# Altium PCB PCB1.PcbDoc
Units mm, origin at the board's own origin, x right, y up, seen from the top; angles counter-clockwise.
Board outline 60.96 x 24.77 mm, 2 copper layers (Top Layer, Bottom Layer); 8 components, 6 nets, 30 pads, 0 vias.
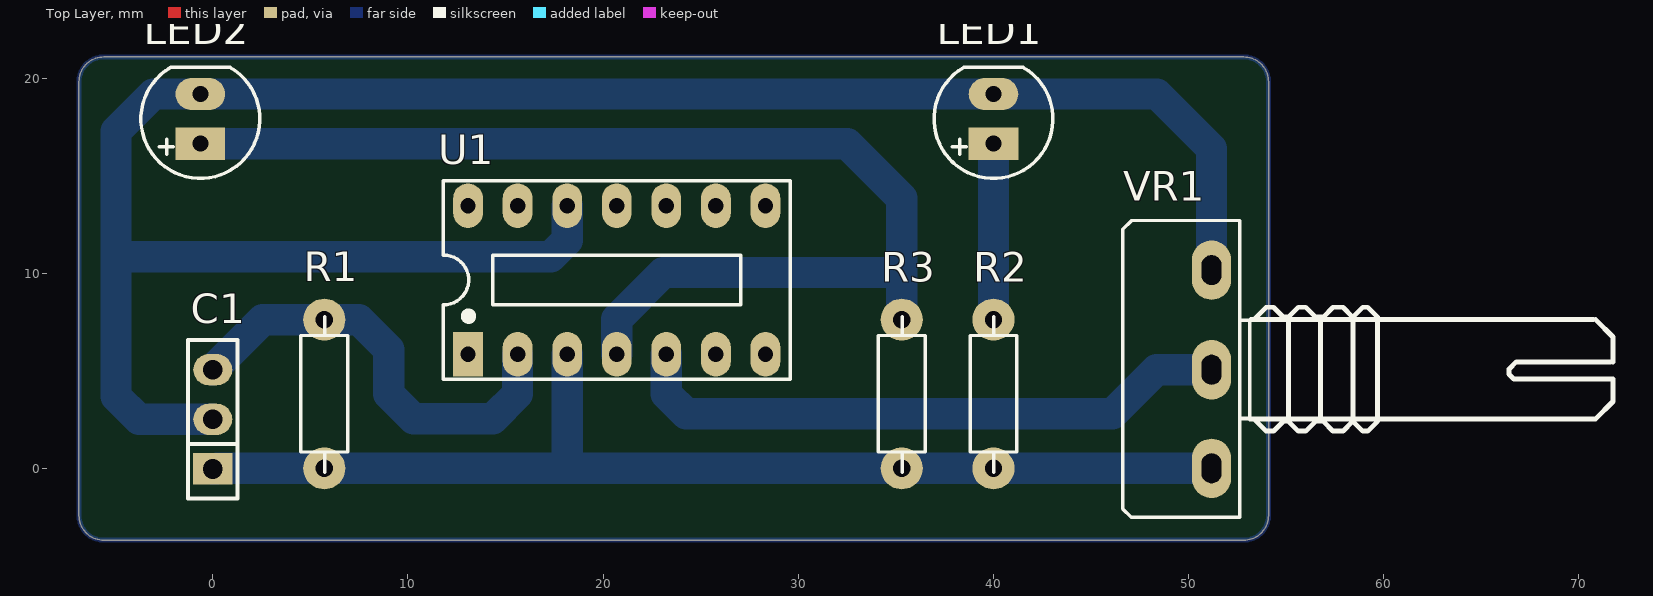
[diagram p0: Top Layer view]
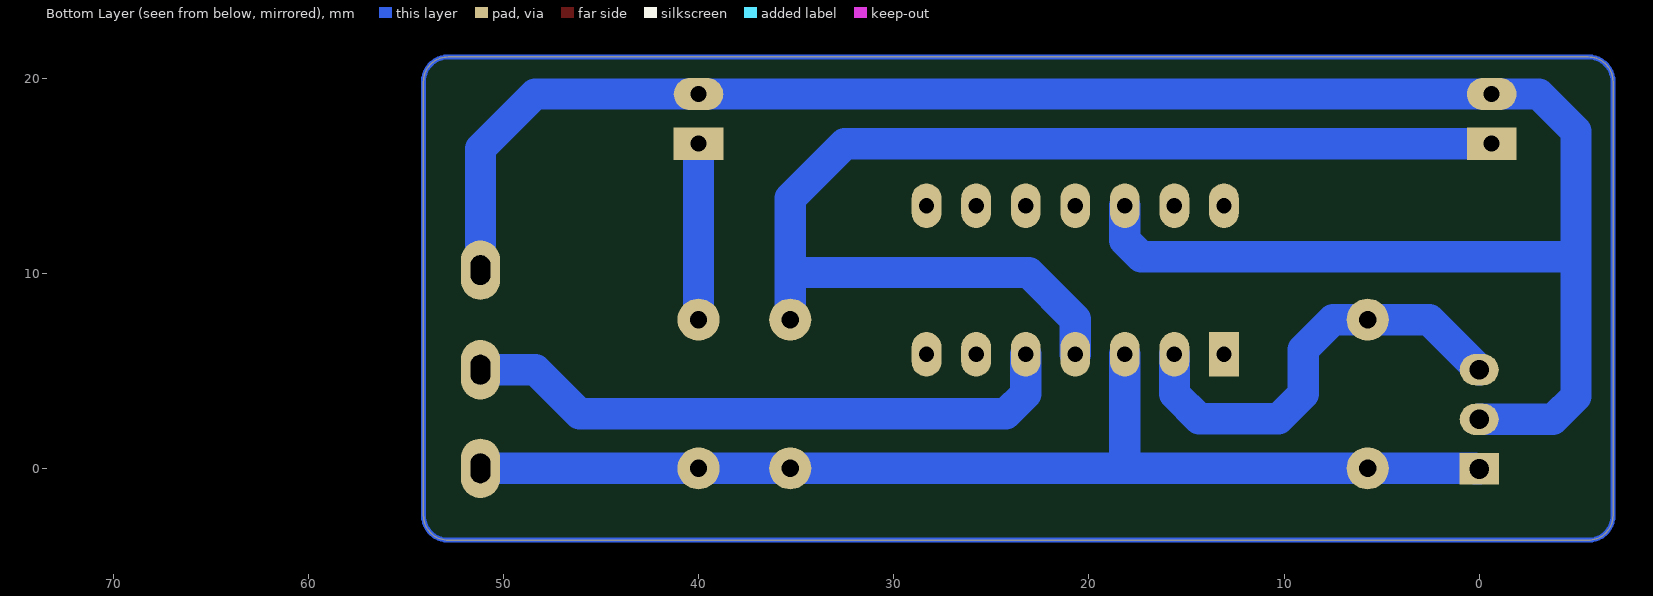
[diagram p1: Bottom Layer view, seen from below]
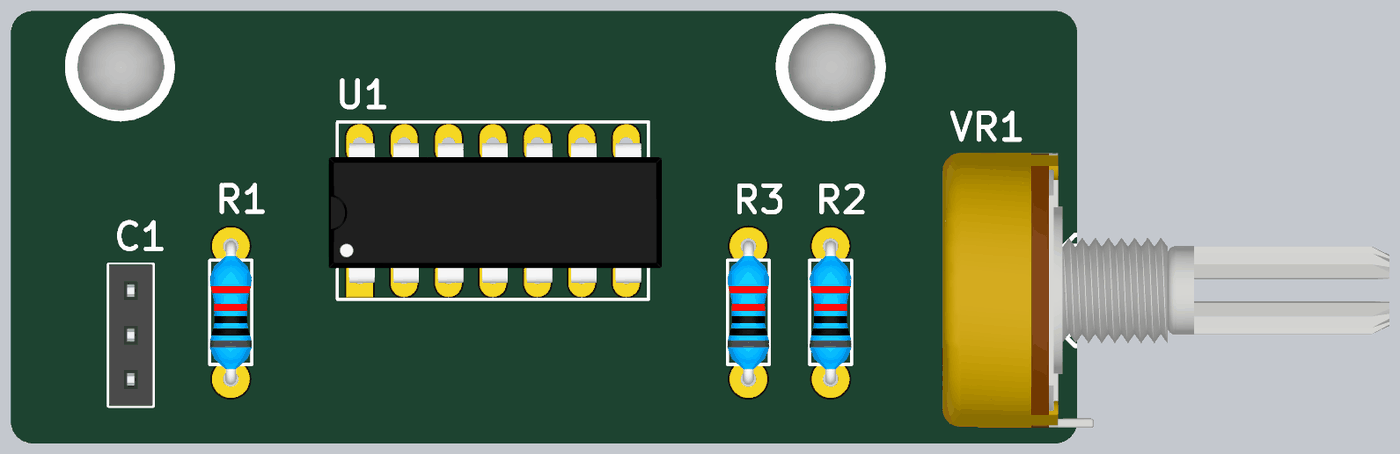
[diagram p2: 3D render of the assembled board from above, using the file's embedded part models]

## Layer stack, top to bottom
Top Solder: solder mask 0.0102, Solder Resist, Dk 3.5
Top Layer: signal copper 0.0356
Dielectric 1: dielectric 0.32, FR-4, Dk 4.8
Bottom Layer: signal copper 0.0356
Bottom Solder: solder mask 0.0102, Solder Resist, Dk 3.5

## Board outline
-6.858,-2.387 -6.858,19.838 cw(c-5.588,19.838) -5.588,21.108 52.832,21.108 cw(c52.832,19.838) 54.102,19.838 54.102,-2.387 cw(c52.832,-2.387) 52.832,-3.657 -5.588,-3.657 cw(c-5.588,-2.387)

## Design rules (kind name [scope] priority, off if disabled: settings)
Clearance [All] p1: gap=0.5 ignorepadtopadclearanceinfootprint=TRUE
PolygonConnect [All] p1: connectstyle=Relief reliefconductorwidth=0.254 reliefentries=4 polygonreliefangle="90 Angle" airgapwidth=0.254
RoomDefinition sch [InComponentClass('sch')] p1: confinementstyle=ConfineIn formatcopy=TRUE lockcomponents=FALSE outline 91.694,-17.627 162.687,-17.627 162.687,10.821 91.694,10.821
RoutingLayers [All] p1: top layer_v5=FALSE bottom layer_v5=TRUE
RoutingVias [All] p1: holewidth=0.711 width=1.27 viastyle="Through Hole" minholewidth=0.711 minwidth=1.27 maxholewidth=0.711 maxwidth=1.27
SolderMaskExpansion [All] p1: expansion=0.102
Width [All] p1: maxlimit=3 minlimit=1.2 preferedwidth=1.6
29 further rules are at their usual default settings.

## Components (designator, comment, footprint, x,y, rotation, side; value= is the part's Value field where it differs from the comment)
C1 "JP3" JP3-C1T 0,0 r90 top
LED1 "LED" LED-5-WHITE 40.005,17.933 r90 top value="LED 3 ly Single Colour"
LED2 "LED" LED-5-WHITE -0.635,17.933 r90 top value="LED 3 ly Single Colour"
R1 "Res" RES-1/4W-SMALL 5.715,3.582 r90 top
R2 "Res" RES-1/4W-SMALL 40.005,3.582 r90 top
R3 "Res" RES-1/4W-SMALL 35.306,3.582 r90 top
U1 "LM339" DIP14 13.081,5.868 r0 top
VR1 "50K" VR-S1 51.181,5.106 r90 top value="Volume 50k"

## Footprints (in the part's own frame and the unit in brackets; to place one, negate y for a bottom-side part, rotate by r counter-clockwise, add the part's x,y. Pads: shape width x height; smd on the part's side, far side on the other; paste and mask are expansions set on the pad)
DIP14 [mil] "DIP, 14-Leads, Row Spacing 7.62mm, Pitch 2.54mm, Body 19.2x6.6mm"
  rect 60x90 hole 31: 1(0,0)
  oval 60x90 hole 31: 2(100,0) 3(200,0) 4(300,0) 5(400,0) 6(500,0) 7(600,0) 8(600,300) 9(500,300) 10(400,300) 11(300,300) 12(200,300) 13(100,300) 14(0,300)
  silkscreen extent -50,-50 650,350, body extent -70,-12 680,302, height 145
JP3-C1T [mm] "3 row, straight, gold plating"
  rect 1.6x2 hole 1.02: 1(0,0)
  oval 1.6x2 hole 1.02: 2(2.54,0) 3(5.08,0)
  silkscreen extent -1.52,-1.27 6.6,1.27, body extent -1.52,-1.25 6.6,1.25, height 8.51
LED-5-WHITE [mil] "LED 2 PIN, 5 ly , Only colour, pin to pin 110mil"
  rect 65x100 hole 32: 1(-50,0)
  oval 65x100 hole 32: 2(50,0)
  silkscreen extent -120,-120 104,120, body extent -124,-125 121,120, height 340
RES-1/4W-SMALL [mil]
  round 85 hole 35: 1(-140,0) 2(160,0)
  silkscreen extent -148,-47 166,47, body extent -152,-47 172,47, height 97
VR-S1 [mil]
  oval 120x78.74 hole 40 slot 60 at 0 deg: 1(-200,0) 2(-1,0) 3(200,0)
  silkscreen extent -299,-810 300,179, body extent -310,-818 310,188, height 839

## Part data
C1: "WR-PHD 2.54 mm Angled Socket Header", Manufacturer="Würth Elektronik eiSos GmbH", partNo=613003143121, ComponentLink1 Description=Manufacturer, ComponentLink1URL=http://www.we-online.com, ComponentLink2 Description=Datasheet, ComponentLink2URL=http://katalog.we-online.de/em/datasheet/6130xx143121.pdf, Created by="Karrer Zheng", Created Date="29 March 2013", NoPins=03
LED1 LED2: "LED Single colour Green and Red"
R1 R2 R3: Manufacturer="Generic Components", Class=Passive, Published=08/06/2000, Publisher="Altium Hobart Technology Centre", SubClass=R
U1: "Low Power Low Offset Voltage Quad Comparators"
VR1: library part VR-S, "Var Resistor"

## Nets (pads, with @x,y where several pads share a name; then routed paths per layer and width w, separated by ;. In a path a pad name is that pad's centre, name@x,y a point inside that pad or via, vN(x,y) a via of type N, cw(c..) or ccw(c..) an arc to the next point about the centre after c; other vN are vias at no path point)
GND: C1.2 LED1.2 LED2.2 U1.12 VR1.3 | length 108.6
  Bottom Layer w1.6: C1.2 -3.784,2.54 -4.953,3.709 -4.953,10.871 ; U1.12 18.161,11.71 17.323,10.871 -4.953,10.871 ; VR1.3 51.181,16.409 48.387,19.203 LED1.2 LED2.2 -3.048,19.203 -4.953,17.298 -4.953,10.871
NetC1_3: C1.3 R1.2 U1.2 | length 22.7
  Bottom Layer w1.6: C1.3 2.566,7.646 R1.2 7.493,7.646 9.017,6.122 9.017,3.836 10.287,2.566 14.351,2.566 15.621,3.836 U1.2
NetLED1_1: LED1.1 R2.2 | length 9
  Bottom Layer w1.6: R2.2 LED1.1
NetLED2_1: LED2.1 R3.2 U1.4 | length 60.7
  Bottom Layer w1.6: LED2.1 32.512,16.663 35.306,13.869 35.306,10.059 ; U1.4 20.701,7.671 23.089,10.059 35.306,10.059 ; R3.2 35.306,10.059
NetU1_5: U1.5 VR1.2 | length 31.3
  Bottom Layer w1.6: U1.5 23.241,3.836 24.257,2.82 46.101,2.82 48.362,5.08 VR1.2
VCC: C1.1 R1.1 R2.1 R3.1 U1.3 VR1.1 | length 57.1
  Bottom Layer w1.6: C1.1 0.2,0 0.226,0.026 R1.1 17.907,0.026 ; U1.3 18.161,0.28 17.907,0.026 ; VR1.1 R2.1 R3.1 17.907,0.026
pads on no net: U1.1 U1.6 U1.7 U1.8 U1.9 U1.10 U1.11 U1.13 U1.14
copper on no net: | length 169.3
  Bottom Layer w0.254: -6.858,-2.387 ccw(c-5.588,-2.387) -5.588,-3.657 52.832,-3.657 ccw(c52.832,-2.387) 54.102,-2.387 54.102,19.838 ccw(c52.832,19.838) 52.832,21.108 6.731,21.108 -5.588,21.108 ccw(c-5.588,19.838) -6.858,19.838 -6.858,-2.387